# Altium PCB USB-C Power Controller.PcbDoc
Units mm, origin at the board's own origin, x right, y up, seen from the top; angles counter-clockwise.
Board outline 19 x 12 mm, 2 copper layers (Top Layer, Bottom Layer), stack 1.57 mm thick; 11 components, 12 nets, 50 pads, 40 vias.
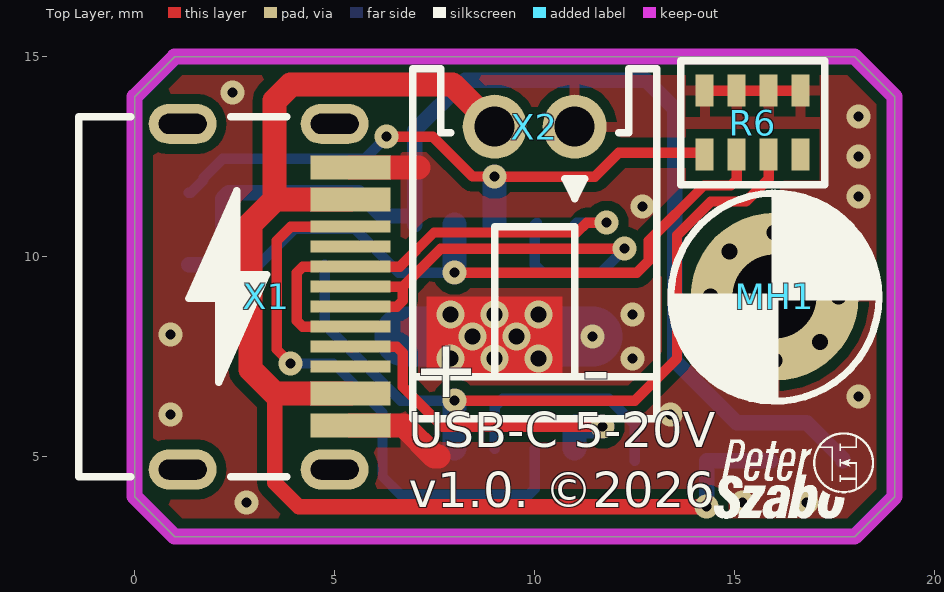
[diagram p0: Top Layer view]
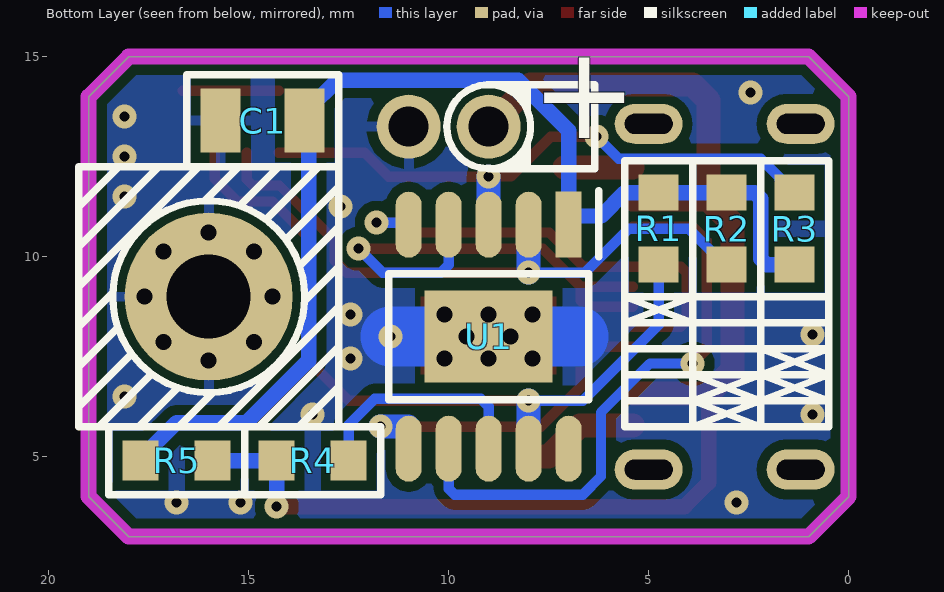
[diagram p1: Bottom Layer view, seen from below]
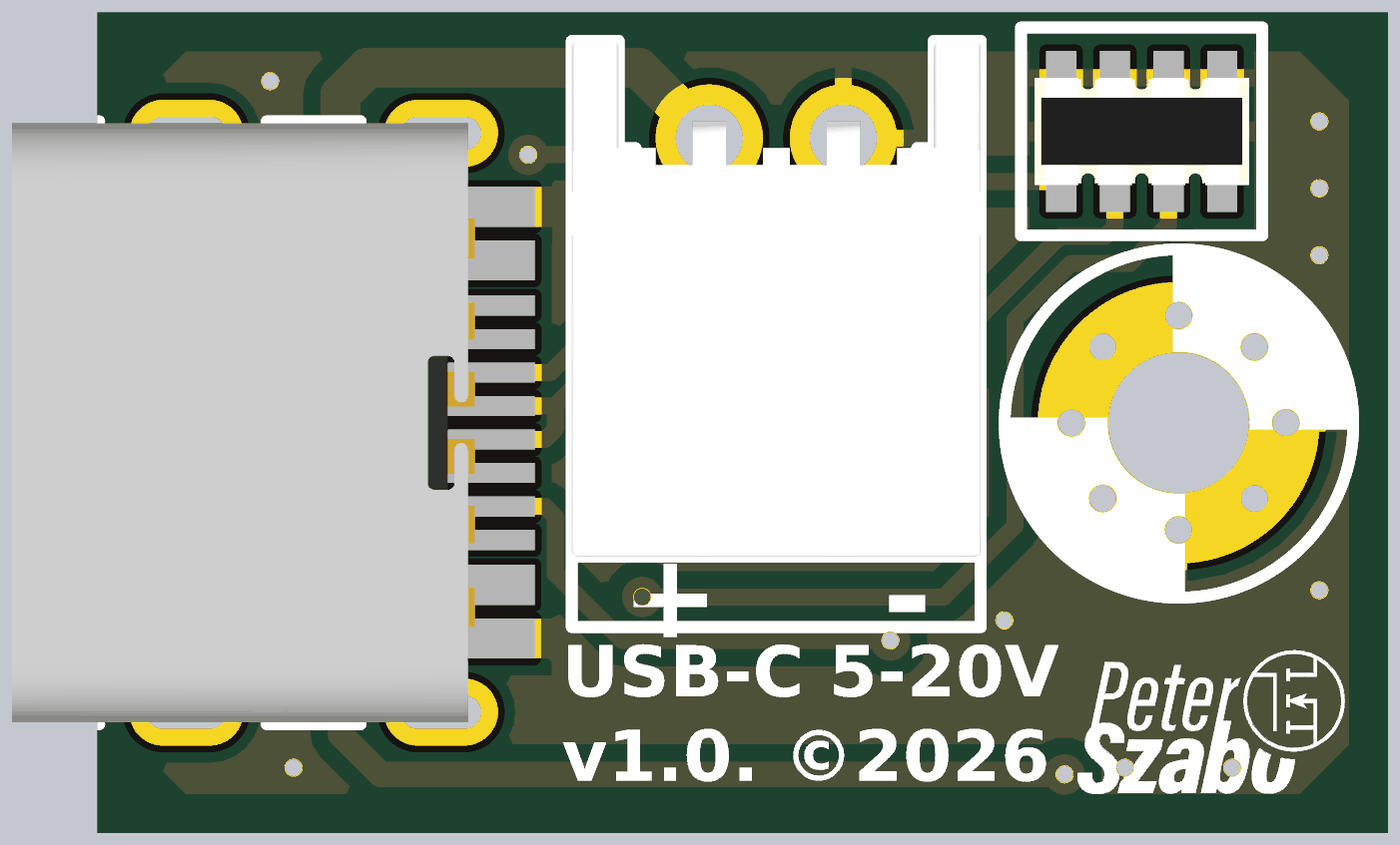
[diagram p2: 3D render of the assembled board from above, using the file's embedded part models]
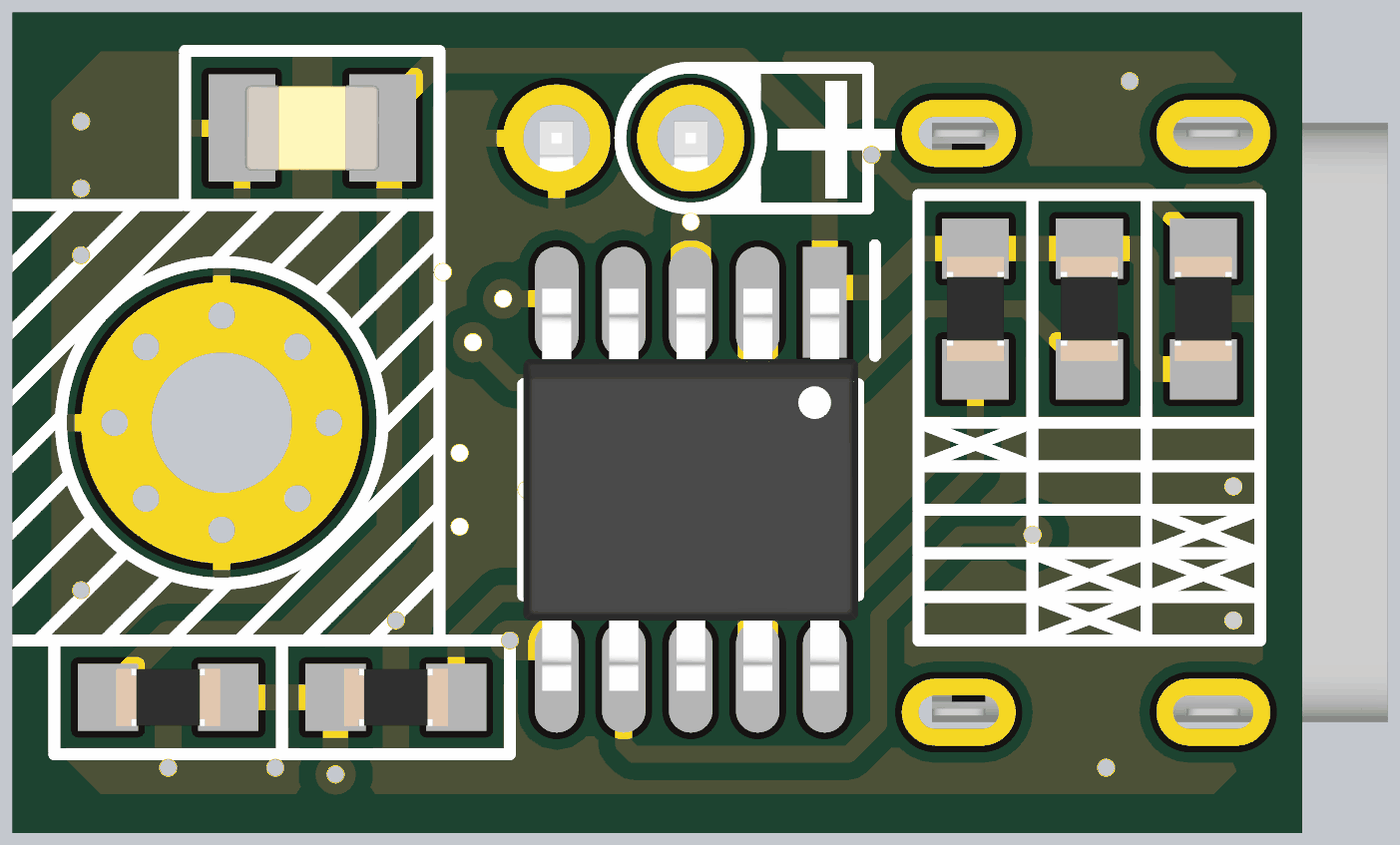
[diagram p3: 3D render of the assembled board from below, using the file's embedded part models]

## Layer stack, top to bottom
Top Solder: solder mask 0.0102, Solder Resist, Dk 3.5
Top Layer: signal copper 0.035
Dielectric1: core 1.5, FR-4, Dk 4.8
Bottom Layer: signal copper 0.035
Bottom Solder: solder mask 0.0102, Solder Resist, Dk 3.5

## Board outline
0,4 0,14 1,15 18,15 19,14 19,4 18,3 1,3

## Design rules (kind name [scope] priority, off if disabled: settings)
AssemblyTestPointUsage [All] p1 off:
AssemblyTestpoint [All] p1 off: testpointundercomponent=TRUE minsize=1.016 maxsize=2.54 preferedsize=1.524 minholesize=0 maxholesize=1.016 preferedholesize=0.813 testpointgrid=0.025 usegrid=TRUE gridtolerance=0 allowsidetop=TRUE allowsidebottom=TRUE
Clearance ClearanceHV [InNetClass('HighVoltage')] p1: gap=0.5 ignorepadtopadclearanceinfootprint=FALSE except(0: Arc-Hole Track-Hole SMDPad-Hole THPad-Hole Via-Hole Fill-Hole Poly-Hole Region-Hole Text-Hole)
Clearance ClearanceFill [InPolygon vs InPolygon] p2: gap=0.25 ignorepadtopadclearanceinfootprint=FALSE except(0: Arc-Hole Track-Hole SMDPad-Hole THPad-Hole Via-Hole Fill-Hole Poly-Hole Region-Hole Text-Hole)
Clearance Poligone [InPolygon vs not InPolygon] p3: gap=0.25 ignorepadtopadclearanceinfootprint=FALSE except(0: Arc-Hole Track-Hole SMDPad-Hole THPad-Hole Via-Hole Fill-Hole Poly-Hole Region-Hole Text-Hole)
Clearance Clearance-xPP-xTP-xTT [All] p4: gap=0.15 ignorepadtopadclearanceinfootprint=FALSE except(0: Arc-Hole Track-Hole SMDPad-Hole THPad-Hole Via-Hole Fill-Hole Poly-Hole Region-Hole Text-Hole)
ComponentClearance [All] p1: gap=0.25 collisioncheckmode=3 verticalgap=0.25 showdistances=FALSE
DiffPairsRouting [All] p1: maxlimit=0.25 minlimit=0.15 mostfreqgap=0.25 toplayer_minwidth=0.254 toplayer_maxwidth=0.381 toplayer_prefwidth=0.381 bottomlayer_minwidth=0.254 bottomlayer_maxwidth=0.381 bottomlayer_prefwidth=0.381 substack1={06652235-AFCE-417E-9911-24E9A01F5C8B} toplayer_{06652235-afce-417e-9911-24e9a01f5c8b}_mingap=0.25 toplayer_{06652235-afce-417e-9911-24e9a01f5c8b}_minwidth=0.381 toplayer_{06652235-afce-417e-9911-24e9a01f5c8b}_maxwidth=0.381 toplayer_{06652235-afce-417e-9911-24e9a01f5c8b}_prefwidth=0.381 bottomlayer_{06652235-afce-417e-9911-24e9a01f5c8b}_mingap=0.25 bottomlayer_{06652235-afce-417e-9911-24e9a01f5c8b}_minwidth=0.381 bottomlayer_{06652235-afce-417e-9911-24e9a01f5c8b}_maxwidth=0.381 bottomlayer_{06652235-afce-417e-9911-24e9a01f5c8b}_prefwidth=0.381 maxuncoupledlength=12.5
FanoutControl Fanout_BGA [IsBGA] p1 off: bgadir=Out bgaviamode=Centered fanoutstyle=Auto fanoutdirection=Alternating viagrid=0.025 // Fanout_BGA (Default Rule)
Height [All] p1: minheight=0 maxheight=508 prefheight=12.5
HoleSize HoleSize-PTH [All] p1: absolutevalues=TRUE maxlimit=12.7 minlimit=0.25 maxpercent=80.000 minpercent=20.000
HoleToHoleClearance [All] p1: gap=0.15 allowstackedmicrovias=TRUE
MinimumAnnularRing "Minimum IAR  >0.45mm" [((ObjectKind = 'Pad') OR (ObjectKind = 'Via')) And (Layer = 'MultiLayer') And (HoleDiameter > AsMM(0.45))] p1: minimumring=0.125 // minimum inner annular ring for pads > 0.45mm finished hole size
MinimumAnnularRing "Minimum IAR <=0.45mm" [((ObjectKind = 'Pad') OR (ObjectKind = 'Via')) And (Layer = 'MultiLayer') And (HoleDiameter <= AsMM(0.45))] p2: minimumring=0.125 // minimum inner annular ring for pads <= 0.45mm finished hole size
MinimumSolderMaskSliver [All] p1: minsoldermaskwidth=0.1
PlaneClearance PlaneClearance-IPI [All] p1: clearance=0.4
PlaneConnect PlaneConnect_1 [All] p1: planeconnectstyle=Relief reliefexpansion=0.508 reliefentries=4 reliefconductorwidth=0.254 reliefairgap=0.254
PlaneConnect [All] p2: planeconnectstyle=Relief reliefexpansion=0.4 reliefentries=4 reliefconductorwidth=0.508 reliefairgap=0.254
PolygonConnect PolygonConnect-xTW [InNet('GND') vs IsVia] p1: connectstyle=Direct reliefconductorwidth=0.508 reliefentries=4 polygonreliefangle="90 Angle" airgapwidth=0.254
PolygonConnect PolygonConnect_1 [InNet('GND') vs not(IsVia)] p2: connectstyle=Relief reliefconductorwidth=0.254 reliefentries=4 polygonreliefangle="90 Angle" airgapwidth=0.254
PolygonConnect [All] p3: connectstyle=Direct reliefconductorwidth=0.381 reliefentries=4 polygonreliefangle="90 Angle" airgapwidth=0.25
RoomDefinition "Power Controller" [InComponentClass('Power Controller')] p1: confinementstyle=ConfineIn formatcopy=TRUE lockcomponents=FALSE outline 21,4 246,4 246,17 21,17
RoutingCorners [All] p1: cornerstyle=45-Degree minsetback=2.5 maxsetback=2.5
RoutingVias "RoutingVias > 0.45mm" [(ObjectKind = 'Via') And (HoleDiameter > AsMM(0.45))] p1: holewidth=0.25 width=0.6 viastyle="Through Hole" minholewidth=0.25 minwidth=0.5 maxholewidth=0.9 maxwidth=1.4 // finishet hole size > 0.45mm
RoutingVias "RoutingVias <= 0.45mm" [(ObjectKind = 'Via') And (HoleDiameter <= AsMM(0.45))] p2: holewidth=0.25 width=0.6 viastyle="Through Hole" minholewidth=0.25 minwidth=0.5 maxholewidth=0.5 maxwidth=1 // finishet hole size <= 0.45mm
SilkToSilkClearance [All] p1: silktosilkclearance=0.2
SilkToSolderMaskClearance SilkscreenOverComponentPads [IsPad] p1: minsilkscreentomaskgap=0.15 clearancetoexposedcopper=TRUE
SolderMaskExpansion [All] p1: expansion=0.1 istentingtop=FALSE
Width Width-xTW [All] p1: maxlimit=5 minlimit=0.23 preferedwidth=0.254 substack1={06652235-AFCE-417E-9911-24E9A01F5C8B} toplayer_{06652235-afce-417e-9911-24e9a01f5c8b}_maxwidth=2.54 bottomlayer_{06652235-afce-417e-9911-24e9a01f5c8b}_maxwidth=2.54
16 further rules are at their usual default settings.

## Components (designator, comment, footprint, x,y, rotation, side; value= is the part's Value field where it differs from the comment)
C1 "1uF" CAP-0805 14.65,13.4 r180 bottom
MH1 "MECH-SCREW" MECH-M2-LARGE-EMPTY-NORMAL-SUPPORT 16,9 r0 top
R1 "0R" RES-0603 4.75,10.7 r90 bottom
R2 "0R" RES-0603 3.05,10.7 r90 bottom
R3 "0R" RES-0603 1.35,10.7 r270 bottom
R4 "10k" RES-0603 13.4,4.9 r180 bottom
R5 "1K" RES-0603 16.8,4.9 r0 bottom
R6 "10k" RES-ARRAY-1206 15.45,13.35 r180 top value=10K
U1 "CH224K" IC-TSSOP-10-TP 9,8 r270 bottom
X1 "CONN-USB-C-DATA" CONN-USB-C-DATA 5,9 r270 top value=TYPE-C-16PIN
X2 "CONN-2P" CONN-2P-JST-2.0MM-RIGHT 10,13.25 r180 top value=NCW200S-02R

## Footprints (in the part's own frame and the unit in brackets; to place one, negate y for a bottom-side part, rotate by r counter-clockwise, add the part's x,y. Pads: shape width x height; smd on the part's side, far side on the other; paste and mask are expansions set on the pad)
CAP-0805 [mm]
  rect 1x1.6 smd: 1(-1.05,0) 2(1.05,0)
  silkscreen extent -1.9,-1.15 1.9,1.15, body extent -1,-0.63 1,0.64, height 0.52
CONN-2P-JST-2.0MM-RIGHT [mm]
  round 1.6 hole 1: 1(1,0) 2(-1,0)
  silkscreen extent -3.05,-1.45 3.05,6.25, body extent -3.05,-1.45 3.05,6.25, height 4.75
CONN-USB-C-DATA [mm]
  oval 1x1.7 hole 0.5 slot 1.2 at 90 deg: 0(-4.32,0) 0(-4.32,-3.8) 0(4.32,0) 0(4.32,-3.8)
  rect 0.6x2 smd: 1(-3.225,0.4) 1(3.221,0.397) 2(-2.425,0.4) 2(2.421,0.397)
  rect 0.3x2 smd: 3(-1.75,0.4) 4(-1.25,0.4) 5(-0.75,0.4) 5(0.75,0.4) 6(-0.25,0.4) 6(0.25,0.4) 7(1.25,0.4) 8(1.75,0.4)
  silkscreen extent -4.5,-6.4 4.5,-1.2, body extent -4.47,-6.4 4.47,0.5, height 3.28
IC-TSSOP-10-TP [mm]
  rect 2.3x3.2 smd: 0(0,0)
  rect 1.65x0.65 smd: 1(-2.8,2)
  oval 1.65x0.65 smd: 2(-2.8,1) 3(-2.8,0) 4(-2.8,-1) 5(-2.8,-2) 6(2.8,-2) 7(2.8,-1) 8(2.8,0) 9(2.8,1) 10(2.8,2)
  silkscreen extent -3.65,-2.5 1.58,2.75, body extent -3,-2.5 3,2.5, height 1.8
MECH-M2-LARGE-EMPTY-NORMAL-SUPPORT [mm]
  round 4.2 hole 2.1: MH(0,0)
  silkscreen extent -2.6,-2.61 2.61,2.59
RES-0603 [mm]
  rect 0.9x1 smd: 1(-0.9,0) 2(0.9,0)
  silkscreen extent -1.7,-0.85 1.7,0.85, body extent -0.77,-0.43 0.78,0.43, height 0.48
RES-ARRAY-1206 [mm]
  rect 0.45x0.8 smd: 1(-1.2,-0.8) 2(-0.4,-0.8) 3(0.4,-0.8) 4(1.2,-0.8) 5(1.2,0.8) 6(0.4,0.8) 7(-0.4,0.8) 8(-1.2,0.8)
  silkscreen extent -1.8,-1.55 1.8,1.55, body extent -1.6,-0.8 1.6,0.8, height 0.51

## Part data
C1: library part SPN-RES-6099, "Capacitor Non-Polar", Tolerance=X7R, Voltage=50V, Distributor=Lomex, Internal ID=SPN-RES-6099, Order number=82-10-21
MH1: library part SPN-CON-0000.17, "M2, large ring, normal support silkscreen", Distributor=N/A, Internal ID=SPN-CON-0000.17, Order number=N/A
R1 R2 R3: library part SPN-RES-5001, "Resistor", Distributor=Lomex, Internal ID=SPN-RES-5001, Order number=81-10-01
R4: library part SPN-RES-5005, "Resistor", Distributor=Lomex, Internal ID=SPN-RES-5005, Order number=80-11-68
R5: library part SPN-RES-5036, "Resistor", Distributor=Lomex, Internal ID=SPN-RES-5036, Order number=80-11-59
R6: library part SPN-RES-5650, "4x resistor array", Distributor=Lomex, Internal ID=SPN-RES-5650, Order number=00-00-00
U1: library part SPN-ICS-0415, "USB PD and Other Fast Charging Protocol Sink Controller", Distributor=LCSC, Internal ID=SPN-ICS-0415, Link=https://www.laskakit.cz/user/related_files/ch224ds1.pdf, Order number=C970725
X1: library part SPN-CON-0416, "Csatlakozó, USB C, 5V, 5A, 16 pin, SMD", ComponentLink1Description=DataSheet, Distributor=Hestore, Internal ID=SPN-CON-0416, Link=https://www.hestore.hu/prod_10046970.html, Order number=100.469.70
X2: library part SPN-CON-0233, "TÁPCSATL. 2.00mm 2P APA 90° NCW200S-02R (G-S) FORR.", Distributor=Lomex, Internal ID=SPN-CON-0233, Link=https://lomex.hu/pdf/(g-s)_ncw200s-xxr.pdf, Order number=43-17-36

## Via types
v1: diameter 0.6, hole 0.25, Top Layer to Bottom Layer, tented both sides, 24 vias
v2: diameter 0.6, hole 0.4, Top Layer to Bottom Layer, tented both sides, 8 vias
v3: diameter 0.7, hole 0.4, Top Layer to Bottom Layer, 6 vias
v4: diameter 0.7, hole 0.4, Top Layer to Bottom Layer, tented both sides, 2 vias

## Nets (pads, with @x,y where several pads share a name; then routed paths per layer and width w, separated by ;. In a path a pad name is that pad's centre, name@x,y a point inside that pad or via, vN(x,y) a via of type N, cw(c..) or ccw(c..) an arc to the next point about the centre after c; other vN are vias at no path point)
GND: C1.1 MH1.MH R6.1 R6.2 R6.3 R6.4 U1.0 X1.1 X2.2 | length 10.2
  Top Layer w0.254: R6.4 R6.3 R6.2 R6.1
  Top Layer w0.6: X1.1@5.397,5.779 6.721,5.779 7.5,5 7.6,5 ; X1.1@5.4,12.225 7.1,12.225
  Bottom Layer w1.5: 6.75,8 v4(8.45,8) ; v4(9.55,8) v1(11.45,8)
  other v1: 2.8,3.85 15.2,3.85 16.8,3.85 0.9,6.05 13.4,6.05 18.1,6.5 12.45,7.45 0.9,8.05 12.45,8.55 12.7,11.25 18.1,11.5 18.1,12.5 18.1,13.5 2.45,14.1
  other v2: 16,7.4 14.869,7.869 17.131,7.869 14.4,9 17.6,9 14.869,10.131 17.131,10.131 16,10.6
  other v3: 7.9,7.45 9,7.45 10.1,7.45 7.9,8.55 9,8.55 10.1,8.55
NetR1_1: R1.1 R6.7 U1.9 | length 19.3
  Top Layer w0.254: v1(8,6.4) 12.5,6.4 13.561,7.461 13.561,10.539 14.398,11.377 15.277,11.377 15.85,11.95 R6.7@15.85,12.6
  Bottom Layer w0.254: R1.1 4.75,8.3 6.65,6.4 v1(8,6.4)
  Bottom Layer w0.6: U1.9 v1(8,6.4)
NetR2_1: R2.1 R6.6 U1.2 | length 16
  Top Layer w0.254: v1(8,9.6) 12.55,9.6 12.85,9.9 12.85,10.4 14.231,11.781 14.901,11.781 15.05,11.93 R6.6@15.05,12.6
  Bottom Layer w0.254: R2.1 3.1,9.8 4,10.7 5.5,10.7 6.6,9.6 v1(8,9.6)
  Bottom Layer w0.6: v1(8,9.6) U1.2
NetR3_1: R3.1 R6.5 U1.3 | length 15.4
  Top Layer w0.254: v1(6.3,13) 7.45,13 8.447,12.003 8.997,12.003 v1(9,12) 11.5,12 12.1,12.6 R6.5@14.25,12.6
  Bottom Layer w0.254: R3.1 1.4,11.6 1.723,11.923 1.723,11.973 2.2,12.45 5.75,12.45 v1(6.3,13)
  Bottom Layer w0.6: U1.3 v1(9,12)
NetR4_2: R4.2 U1.8 | length 5.8
  Bottom Layer w0.254: U1.8 9,6.25 9.2,6.45 11.85,6.45 12.5,5.8 R4.2
NetU1_4: U1.4 X1.6 | length 12.6
  Top Layer w0.254: X1.6@5.4,9.25 6.7,9.25 ; X1.6@5.4,8.75 6.55,8.75 6.7,8.9 6.7,9.25 ; v1(12.25,10.2) 7.65,10.2 6.7,9.25
  Bottom Layer w0.254: U1.4@10.053,10.853 U1.4 10,9.8 10.2,9.6 11.65,9.6 v1(12.25,10.2)
NetU1_5: U1.5 X1.5 | length 11.7
  Top Layer w0.254: X1.5@5.4,8.25 4.199,8.25 4.05,8.399 4.05,9.601 4.199,9.75 5.4,9.75 6.629,9.75 7.483,10.604 11.054,10.604 11.3,10.85 v1(11.8,10.85)
  Bottom Layer w0.254: U1.5 11.05,10.85 v1(11.8,10.85)
NetU1_6: U1.6 X1.7 | length 8.9
  Top Layer w0.254: X1.7@5.423,7.727 X1.7 6.55,7.75 6.7,7.6 6.7,6.75 7.7,5.75 v1(11.7,5.75)
  Bottom Layer w0.6: U1.6 11,5.686 U1.6@11.023,5.71 ; U1.6@11.023,5.75 v1(11.7,5.75)
NetU1_7: U1.7 X1.3 | length 14.7
  Top Layer w0.254: v1(3.9,7.329) 3.55,7.679 3.55,10.4 3.9,10.75 X1.3
  Bottom Layer w0.254: v1(3.9,7.329) 4.971,7.329 6.196,6.104 6.196,4.504 6.65,4.05 9.851,4.05 10,4.199 U1.7
PG: U1.10
VBUS: R4.1 R5.1 X1.2 X2.1 | length 33.7
  Top Layer w0.381: 3.5,6.579 3.5,4.35 4.1,3.75 v1(14.3,3.75)
  Top Layer w0.6: X1.2@5.397,6.579 3.5,6.579 2.9,7.179 2.9,10.825 3.5,11.425 ; X1.2@5.4,11.425 3.5,11.425 ; X2.1 7.95,14.3 3.9,14.3 3.5,13.9 3.5,11.425
  Bottom Layer w0.381: v1(14.3,3.75) R4.1 R5.1
VDD: C1.2 R1.2 R2.2 R3.2 R5.2 U1.1 | length 28.7
  Bottom Layer w0.381: R3.2 2.05,9.8 2.2,9.95 2.2,11.45 2.35,11.6 R2.2 R1.2 5.6,11.6 6.185,11.015 U1.1@7,11.015 ; U1.1 U1.1@7,11.015 ; R5.2 17.7,4.95 16.8,5.85 15.05,5.85 13.5,7.4 13.5,13.7 12.791,14.409 8.259,14.409 7,13.15 U1.1@7,11.015
pads on no net: R6.8 X1.0 X1.4 X1.8

## Polygon pours and split planes (outlines as drawn)
GND on Bottom Layer "GND_L02_P000" (solid, pour order 0): 18,15 19,14 19,4 18,3 1,3 0,4 0,14 1,15
GND on Top Layer "GND_L01_P001" (solid, pour order 1): 18,15 19,14 19,4 18,3 1,3 0,4 0,14 1,15

## Keep-outs
Keep-Out Layer:
  the board outline again, w0.4

## Other copper
Top Layer:
  rectangle net GND: 7.3,7.05 10.7,9

## Silkscreen, mask and mechanical layers (free items; w line width, h text height)
Top Overlay:
  drawing of 19 lines, arcs and shapes, not listed
  text "+    -" at 6.95,6 h2.5
  text "USB-C 5-20V / v1.0. ©2026" at 6.85,3.45 h1.5
Bottom Overlay:
  circle w0.178: c9,13.25 r1.05
  region: 9,14.3 ccw(c9,13.25) 7.95,13.25 7.95,13.248 ccw(c8.998,13.248) 8.998,12.2 7.95,12.2 7.95,14.3
  lines w0.178: 0.5,8.35 5.6,8.35 3.9,9 3.9,5.75 ; 0.5,9 0.5,5.75 5.6,5.75 5.6,9 3.9,8.35 ; 2.2,7.7 0.5,7.05 ; 3.9,7.05 2.2,6.4 ; 5.6,6.4 0.5,6.4 2.2,7.05 ; 5.6,7.05 0.5,7.05 ; 5.6,7.7 0.5,7.7 2.2,7.05 ; 9,12.2 6.35,12.2 6.35,14.3 9,14.3 ; 0.5,7.05 2.2,6.4 ; 2.2,6.4 3.9,5.75 ; 2.2,7.05 3.9,6.4 ; 2.2,9 2.2,5.75 3.9,6.4 ; 2.2,9 2.2,9 ; 3.9,5.75 3.9,6.4
  text "+" at 7.95,12.2 h4
Top Solder:
  region: 7.9,9 10.1,9 cw(c10.1,8.55) 10.55,8.55 10.55,7.45 cw(c10.1,7.45) 10.1,7 7.9,7 cw(c7.9,7.45) 7.45,7.45 7.45,8.55 cw(c7.9,8.55)
Mechanical 2-BoardOutline:
  the board outline again, w0.254

## Dimensions
16,9 to 19,4 on Mechanical 3 - Dimensions
16,9 to 0,4 on Mechanical 3 - Dimensions
16,9 to 18,3 on Mechanical 3 - Dimensions
18,15 to 16,9 on Mechanical 3 - Dimensions
1,15 to 1,3 on Mechanical 3 - Dimensions
0,14 to 19,14 on Mechanical 3 - Dimensions